# Altium PCB non.PcbDoc
Units mil, origin at the board's own origin, x right, y up, seen from the top; angles counter-clockwise.
Board outline 5000 x 3000 mil, 2 copper layers (Top Layer, Bottom Layer); 35 components, 42 nets, 179 pads, 0 vias.
Unrouted connection lines stored in the file: 110.
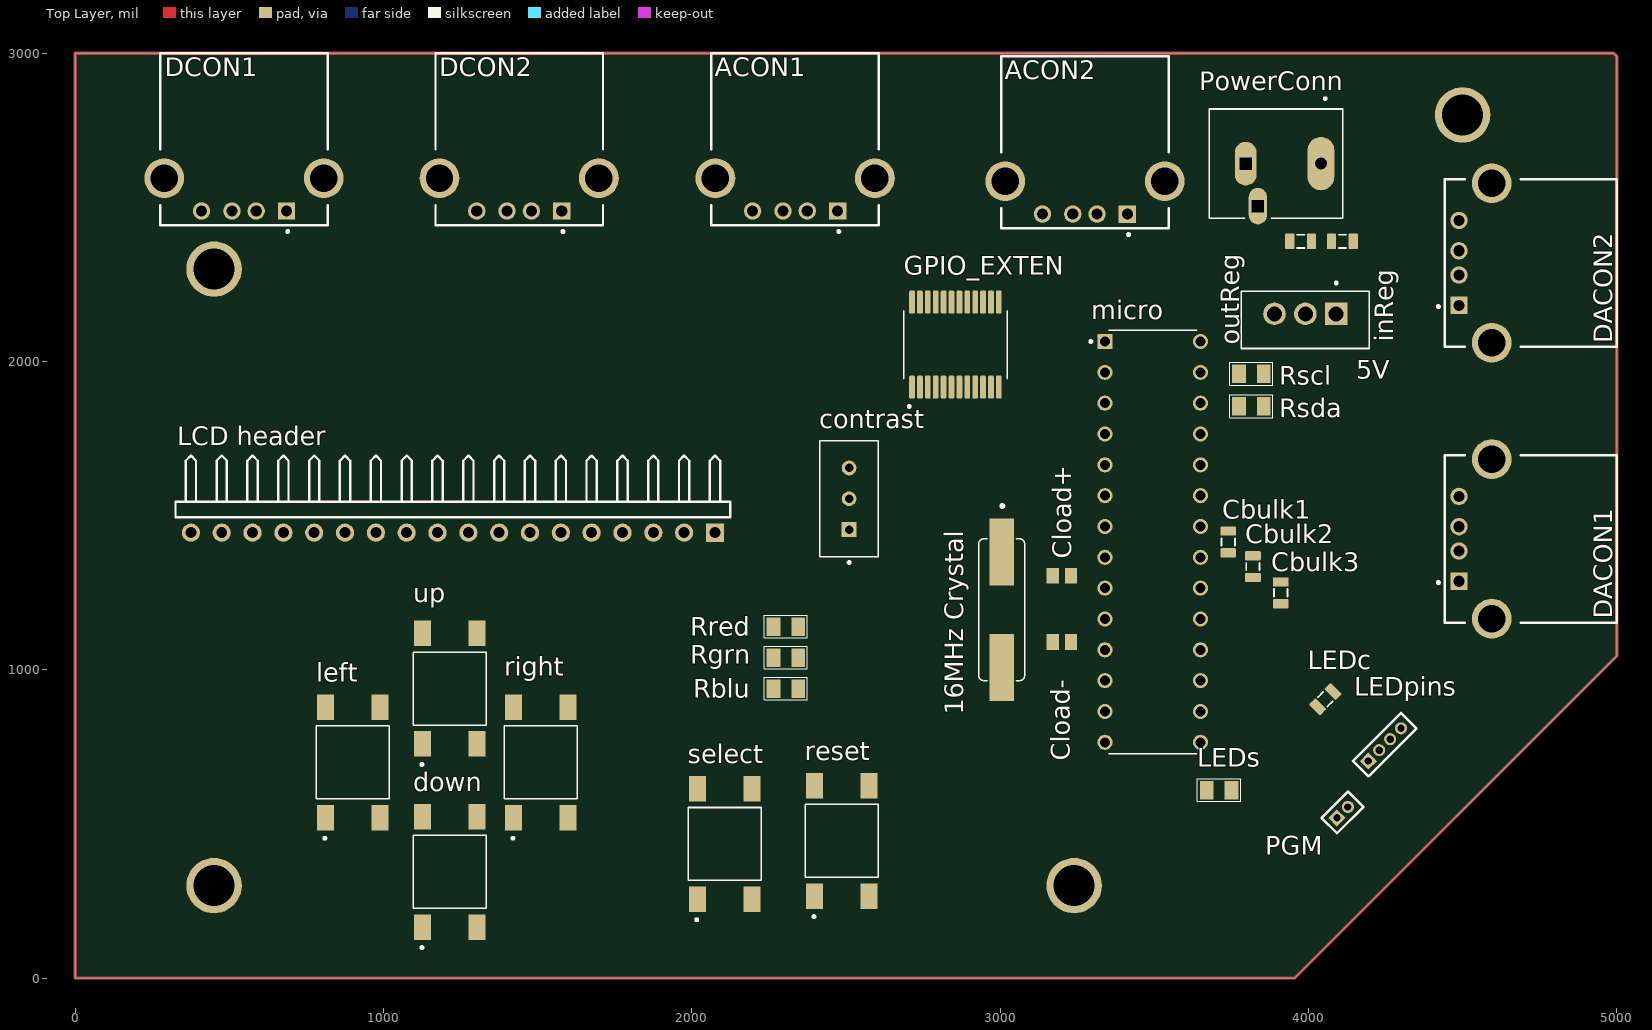
[diagram p0: Top Layer view]
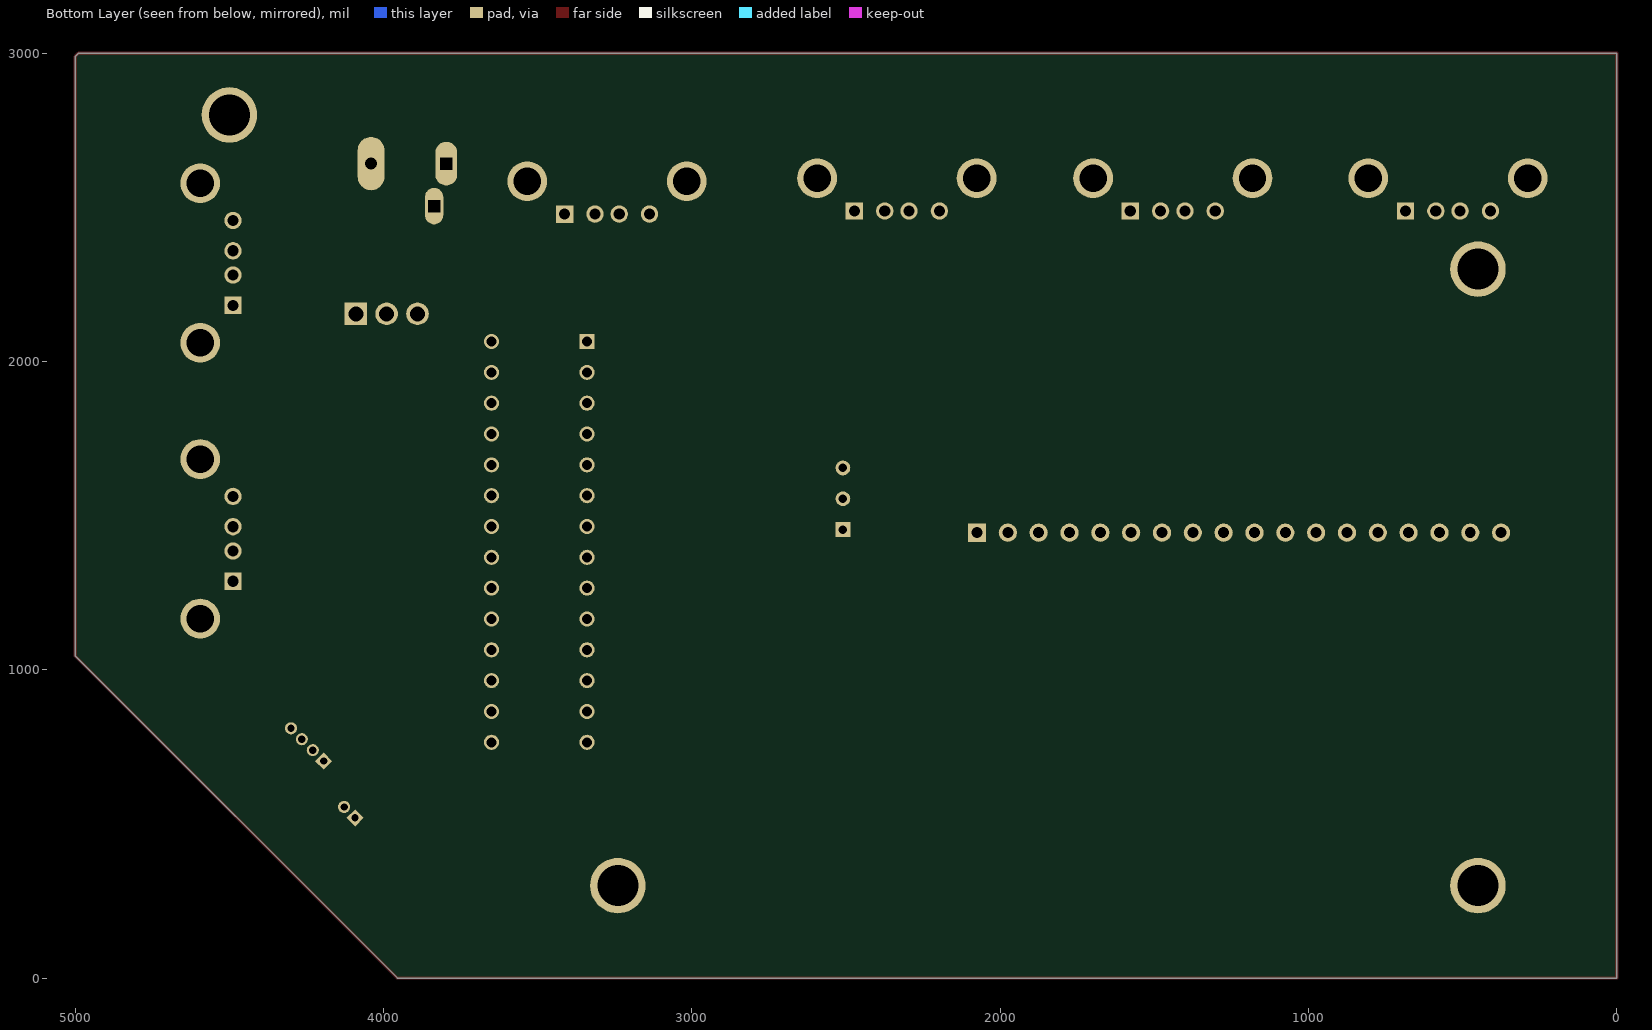
[diagram p1: Bottom Layer view, seen from below]

## Layer stack, top to bottom
Top Solder: solder mask 0.4, Solder Resist, Dk 3.5
Top Layer: signal copper 1.4
Dielectric 1: dielectric 12.6, FR-4, Dk 4.8
Bottom Layer: signal copper 1.4
Bottom Solder: solder mask 0.4, Solder Resist, Dk 3.5

## Board outline
0,0 3955,0 5000,1045 5000,2990 4990,3000 0,3000

## Design rules (kind name [scope] priority, off if disabled: settings)
Clearance [All] p1: gap=10 ignorepadtopadclearanceinfootprint=FALSE except(0: Arc-Hole Track-Hole SMDPad-Hole THPad-Hole Via-Hole Fill-Hole Poly-Hole Region-Hole Text-Hole)
PolygonConnect [All] p1: connectstyle=Relief reliefconductorwidth=10 reliefentries=4 polygonreliefangle="90 Angle" airgapwidth=10
RoutingVias [All] p1: holewidth=28 width=50 viastyle="Through Hole" minholewidth=28 minwidth=50 maxholewidth=28 maxwidth=50
SolderMaskExpansion [All] p1: expansion=4 istentingtop=FALSE
Width [All] p1: maxlimit=10 minlimit=10 preferedwidth=10
30 further rules are at their usual default settings.

## Components (designator, comment, footprint, x,y, rotation, side; value= is the part's Value field where it differs from the comment)
5V "LM78M05CT" TO254P1054X470X1955-3 3990,2155 r180 top
"16MHz Crystal" "FC4SDCBMM16.0-T1" XTAL_FOXSDLF/160-20 3005,1195 r270 top
ACON1 "USB1130-15-A_REVA" GCT_USB1130-15-A_REVA 2335,2595 r180 top
ACON2 "USB1130-15-A_REVA" GCT_USB1130-15-A_REVA 3275,2585 r180 top
Cbulk1 "Capacitor 4.7µF +/-40% 25V 0805" CAPC0805(2012)145_L 3740,1415 r90 top value=100nF
Cbulk2 "Capacitor 4.7µF +/-40% 25V 0805" CAPC0805(2012)145_L 3820,1335 r90 top value=100nF
Cbulk3 "Capacitor 4.7µF +/-40% 25V 0805" CAPC0805(2012)145_L 3910,1250 r90 top value=100nF
Cload+ "Capacitor 1 uF +/- 10% 50 V 0805" CAPC2013X135X45ML10T25 3200,1305 r180 top value=20pF
Cload- "Capacitor 1 uF +/- 10% 50 V 0805" CAPC2013X135X45ML10T25 3200,1090 r0 top value=20pF
contrast "3296W-1-254LF" TRIM_3296W-1-254LF 2510,1555 r90 top
DACON1 "USB1130-15-A_REVA" GCT_USB1130-15-A_REVA 4595,1425 r90 top
DACON2 "USB1130-15-A_REVA" GCT_USB1130-15-A_REVA 4595,2320 r90 top
DCON1 "USB1130-15-A_REVA" GCT_USB1130-15-A_REVA 547.37,2595 r180 top
DCON2 "USB1130-15-A_REVA" GCT_USB1130-15-A_REVA 1440,2595 r180 top
down "4-1437565-2" SW_4-1437565-2 1215,345 r90 top
GPIO_EXTEN "MCP23018-E/SS" SOP65P780X200-24N 2855,2055 r90 top
inReg "Capacitor 4.7µF +/-40% 25V 0805" CAPC0805(2012)145_L 4110.04,2390 r180 top value=330nF
"LCD header" "Header 18H" HDR1X18H 2075,1445 r180 top
LEDc "Capacitor 4.7µF +/-40% 25V 0805" CAPC0805(2012)145_L 4055,905 r45 top value=100nF
LEDpins "MHDR1X4" MHDR1X4 4194.29,704.29 r45 top
LEDs "R_0805_4.7K_1%" 0805_Resistor 3710,610 r0 top value=220
left "4-1437565-2" SW_4-1437565-2 900,700 r90 top
micro "ATMEGA328-PU" DIP787W46P254L3467H508Q28 3495,1415 r0 top
outReg "Capacitor 4.7µF +/-40% 25V 0805" CAPC0805(2012)145_L 3975,2390 r0 top value=100nF
PGM "MHDR1X2" MHDR1X2 4092.64,520 r45 top
PowerConn "PJ-044BH" CUI_PJ-044BH 3895,2642.14 r270 top
Rblu "R_0805_200_1%" 0805_Resistor 2305,939.44 r0 top value=200
reset "4-1437565-2" SW_4-1437565-2 2486.42,445.47 r90 top
Rgrn "R_0805_200_1%" 0805_Resistor 2305,1040 r0 top value=200
right "4-1437565-2" SW_4-1437565-2 1510,700 r90 top
Rred "R_0805_200_1%" 0805_Resistor 2305,1140.56 r0 top value=200
Rscl "R_0805_4.7K_1%" 0805_Resistor 3815,1960 r0 top value=4.7K
Rsda "R_0805_4.7K_1%" 0805_Resistor 3815,1855 r0 top value=4.7K
select "4-1437565-2" SW_4-1437565-2 2106.42,435.47 r90 top
up "4-1437565-2" SW_4-1437565-2 1215,939.13 r90 top

## Footprints (in the part's own frame and the unit in brackets; to place one, negate y for a bottom-side part, rotate by r counter-clockwise, add the part's x,y. Pads: shape width x height; smd on the part's side, far side on the other; paste and mask are expansions set on the pad)
0805_Resistor [mil] "0805 Resistor"
  rect 45x60 smd: 1(-40,0) 2(40,0)
  silkscreen extent -70,-37 70,37, body extent -39,-25 39,25, height 31
CAPC0805(2012)145_L [mm] "Chip Capacitor, Body 2.0x1.2mm, Height 1.45mm, IPC High Density"
  rrect25% 0.76x1.3 smd: 1(-0.9,0) 2(0.89,0)
  silkscreen extent -0.3,-0.55 0.3,0.55, body extent -1,-0.6 1,0.6, height 1.45
CAPC2013X135X45ML10T25 [mm] "Chip Capacitor, 2-Leads, Body 2.10x1.35mm, IPC Low Density"
  rect 1x1.3 smd: 1(-0.75,0) 2(0.75,0)
  body extent -1.05,-0.67 1.05,0.67, height 1.35
CUI_PJ-044BH [mm]
  oval 4.4x2.2 hole 1: 1(0,3.7)
  oval 3.6x1.8 hole 1 square: 2(0,-2.5)
  oval 3.016x1.508 hole 1 square: 3(3.5,-1.5)
  silkscreen extent -5.45,-5.5 4.5,5.5
DIP787W46P254L3467H508Q28 [mm]
  rect 1.25x1.25 hole 0.83: 1(-3.937,16.51)
  round 1.25 hole 0.83: 2(-3.937,13.97) 3(-3.937,11.43) 4(-3.937,8.89) 5(-3.937,6.35) 6(-3.937,3.81) 7(-3.937,1.27) 8(-3.937,-1.27) 9(-3.937,-3.81) 10(-3.937,-6.35) 11(-3.937,-8.89) 12(-3.937,-11.43) 13(-3.937,-13.97) 14(-3.937,-16.51) 15(3.937,-16.51) 16(3.937,-13.97) 17(3.937,-11.43) 18(3.937,-8.89) 19(3.937,-6.35) 20(3.937,-3.81) 21(3.937,-1.27) 22(3.937,1.27) 23(3.937,3.81) 24(3.937,6.35) 25(3.937,8.89) 26(3.937,11.43) 27(3.937,13.97) 28(3.937,16.51)
  silkscreen extent -5.2,-17.45 3.62,17.45, body extent -3.95,-17.34 3.95,17.34, height 4.57
GCT_USB1130-15-A_REVA [mm]
  rect 1.428x1.428 hole 0.92: 1(-3.5,2.71)
  round 1.428 hole 0.92: 2(-1,2.71) 3(1,2.71) 4(3.5,2.71)
  round 3.276 hole 2.26: S1(-6.57,0) S2(6.57,0)
  silkscreen extent -6.9,-10.28 6.9,4.5, body extent -7.8,-10.28 7.8,3.88, height 6.99
HDR1X18H [mm] "Connector; Header; 18 Position; Right Angle"
  rect 1.5x1.5 hole 0.9: 1(0,0)
  round 1.5 hole 0.9: 2(2.54,0) 3(5.08,0) 4(7.62,0) 5(10.16,0) 6(12.7,0) 7(15.24,0) 8(17.78,0) 9(20.32,0) 10(22.86,0) 11(25.4,0) 12(27.94,0) 13(30.48,0) 14(33.02,0) 15(35.56,0) 16(38.1,0) 17(40.64,0) 18(43.18,0)
  silkscreen extent -1.27,-6.35 44.45,-1.27
MHDR1X2 [mm] "Connector; Header; 2 Position"
  rect 1x1 hole 0.6: 1(0,0)
  round 1 hole 0.6: 2(1.27,0)
  silkscreen extent -0.9,-0.9 2.17,0.9
MHDR1X4 [mm] "Connector; Header; 4 Position"
  rect 1x1 hole 0.6: 1(0,0)
  round 1 hole 0.6: 2(1.27,0) 3(2.54,0) 4(3.81,0)
  silkscreen extent -0.9,-0.9 4.71,0.9
SOP65P780X200-24N [mm]
  rrect50% 1.9x0.48 smd: 1(-3.505,3.575) 2(-3.505,2.925) 3(-3.505,2.275) 4(-3.505,1.625) 5(-3.505,0.975) 6(-3.505,0.325) 7(-3.505,-0.325) 8(-3.505,-0.975) 9(-3.505,-1.625) 10(-3.505,-2.275) 11(-3.505,-2.925) 12(-3.505,-3.575) 13(3.505,-3.575) 14(3.505,-2.925) 15(3.505,-2.275) 16(3.505,-1.625) 17(3.505,-0.975) 18(3.505,-0.325) 19(3.505,0.325) 20(3.505,0.975) 21(3.505,1.625) 22(3.505,2.275) 23(3.505,2.925) 24(3.505,3.575)
  silkscreen extent -5.2,-4.25 2.8,4.25
SW_4-1437565-2 [mm]
  rect 2.1x1.4 smd: 1(-4.55,2.25) 2(4.55,2.25) 3(-4.55,-2.25) 4(4.55,-2.25)
  silkscreen extent -6.35,-3 3,3
TO254P1054X470X1955-3 [mm]
  rect 1.86x1.86 hole 1.24: 1(-2.54,0)
  round 1.86 hole 1.24: 2(0,0) 3(2.54,0)
  silkscreen extent -5.27,-2.64 5.27,2.86, body extent -4.98,-4.45 4.98,0, height 15.75
TRIM_3296W-1-254LF [mm]
  rect 1.218x1.218 hole 0.71: 1(-2.54,0)
  round 1.218 hole 0.71: 2(0,0) 3(2.54,0)
  silkscreen extent -5.35,-2.41 4.76,2.42, body extent -4.76,-2.41 4.76,2.42, height 11.55
XTAL_FOXSDLF/160-20 [mm]
  rect 5.5x2 smd: 1(-4.75,0) 2(4.75,0)
  silkscreen extent -8.6,-1.9 5.85,1.9

## Part data
5V: "Linear Voltage Regulator IC 1 Output 500mA TO-220-3", Package="TO-220 ON Semiconductor", Availability=Warning, Check_prices=https://www.snapeda.com/parts/LM78M05CT/ON%20Semiconductor/view-part/2776523/?ref=eda, MF="ON Semiconductor", MP=LM78M05CT, Price=None, Purchase-URL=https://pricing.snapeda.com/search/part/LM78M05CT/?ref=eda, SnapEDA_Link=https://www.snapeda.com/parts/LM78M05CT/ON%20Semiconductor/view-part/2776523/?ref=snap
"16MHz Crystal": "16 MHz Â±30ppm Crystal 20pF 40 Ohms HC-49/US", Package="HC-49/US Fox Electronics", Availability="In Stock", Check_prices=https://www.snapeda.com/parts/FC4SDCBMM16.0-T1/Fox+Electronics/view-part/?ref=eda, MF="Fox Electronics", MP=FC4SDCBMM16.0-T1, Price=None, Purchase-URL=https://pricing.snapeda.com/search/part/FC4SDCBMM16.0-T1/?ref=eda, SnapEDA_Link=https://www.snapeda.com/parts/FC4SDCBMM16.0-T1/Fox+Electronics/view-part/?ref=snap
ACON1 ACON2 DACON1 DACON2 DCON1 DCON2 down left reset right select up: Package=None, Availability=Unavailable, Price=None
  ACON1 ACON2 DACON1 DACON2 DCON1 DCON2: MF="{'manufacturer': u'Global Connector Technology'}", MP=USB1130-15-A_REVA
  down left reset right select up: MF="{'manufacturer': u'TE Connectivity'}", MP=4-1437565-2
Cbulk1 Cbulk2 Cbulk3 inReg LEDc outReg: library part CMP-001-00080-5, "Chip Capacitor, 4.7µF +/-40%, 25V, 0805, Thickness 1.45 mm", Capacitor Type=Ceramic, Case/Package=0805, Max Operating Temperature=85°C, Min Operating Temperature=-55°C, Tolerance=20%, Voltage Rating=25V, Mounting Technology=SMT, Pins=2
Cload+ Cload-: library part CMP-001-00007-7, "Chip Capacitor, 1 uF, +/- 10%, 50 V, 0805 (2012 Metric)", Capacitor Type=Ceramic, Case/Package=0805, Max Operating Temperature=125°C, Min Operating Temperature=-55°C, Tolerance=10%, Voltage Rating=50V, Mounting Technology=SMT, Pins=2
contrast: "Res Cermet Trimmer 500K Ohm 10% 0.5W 25(Elec)Turn 2.19mm (9.53 X 4.83 X 11.55mm) Pin Thru-Hole Tube", Package=None, Availability=Unavailable, MF="{'manufacturer': u'Bourns'}", MP=3296W-1-254LF, Price=None
GPIO_EXTEN: "IC: expander; 16bit I/O port; I2C; SSOP24; 1.8Ã·5.5VDC", Package=None, Availability=Unavailable, MF="{'manufacturer': u'Microchip'}", MP=MCP23018-E/SS, Price=None
"LCD header": "Header, 18-Pin, Right Angle", LatestRevisionDate=17-Jul-2002, LatestRevisionNote="Re-released for DXP Platform.", Publisher="Altium Limited"
LEDpins: "Header, 4-Pin", LatestRevisionDate=17-Jul-2002, LatestRevisionNote="Re-released for DXP Platform.", Publisher="Altium Limited"
LEDs Rscl Rsda: library part CMP-058-000045-1, "RES 4.7K OHM 1/8W 1% 0805 SMD", Manufacturer=Yageo, Manufacturer Part Number=AC0805FR-074K7L, Package=0805_Resistor, Power Rating=0.125W, ComponentLink1Description=DigiKey, ComponentLink1URL=https://www.digikey.com/products/en?keywords=YAG3738TR-ND, Design Item ID=R_0805_4.7K_1%, DigiKey PN=YAG3738TR-ND, Source=resistor.SchLib, SVP Creator="Andrew Wu"
micro: "AVR AVRÂ® ATmega Microcontroller IC 8-Bit 20MHz 32KB (16K x 16) FLASH 28-PDIP", Package=None, Availability=Unavailable, MF="{'manufacturer': u'Microchip Technology'}", MP=ATMEGA328-PU, Price=None
PGM: "Header, 2-Pin", LatestRevisionDate=17-Jul-2002, LatestRevisionNote="Re-released for DXP Platform.", Publisher="Altium Limited"
PowerConn: "2.5 mm Center Pin, 5.0 A, Vertical, Through Hole, Dc Power Jack Connector", Package=None, Availability=Unavailable, MF="{'manufacturer': u'CUI Devices'}", MP=PJ-044BH, Price=None
Rblu Rgrn Rred: library part CMP-058-000027-1, "RES 200 OHM 1/8W 1% 0805 SMD", Manufacturer=Yageo, Manufacturer Part Number=RC0805FR-07200RL, Package=0805_Resistor, Power Rating=0.125W, ComponentLink1Description=DigiKey, ComponentLink1URL=https://www.digikey.com/products/en?keywords=311-200CRCT-ND, Design Item ID=R_0805_200_1%, DigiKey PN=311-200CRCT-ND, Source=resistor.SchLib, SVP Creator="Spencer Berglund"

## Free pads (board coordinates)
  round 180 hole 133 unplated: 2(450,300) 2(450,2300) 2(3240,300) 2(4500,2800)

## Nets (pads, with @x,y where several pads share a name; then routed paths per layer and width w, separated by ;. In a path a pad name is that pad's centre, name@x,y a point inside that pad or via, vN(x,y) a via of type N, cw(c..) or ccw(c..) an arc to the next point about the centre after c; other vN are vias at no path point)
+5: 5V.3 "LCD header.2" "LCD header.15" ACON1.1 ACON2.1 Cbulk1.2 Cbulk2.2 Cbulk3.2 contrast.1 DACON1.1 DACON2.1 DCON1.1 DCON2.1 GPIO_EXTEN.10 GPIO_EXTEN.14 LEDc.1 LEDpins.1 micro.7 micro.20 micro.21 outReg.1 Rscl.1 Rsda.1
+12: 5V.1 inReg.1 PowerConn.1
ACON1-A1: ACON1.2 DACON1.3 micro.23
ACON1-A2: ACON1.3 micro.24
ACON2-A1: ACON2.2 micro.25
ACON2-A2: ACON2.3 DACON2.3 micro.26
contWipe: "LCD header.3" contrast.2
DACON1-D1: DACON1.2 micro.6
DACON2-D1: DACON2.2 micro.17
DCON1-D1: DCON1.2 micro.5
DCON1-D2: DCON1.3 micro.11
DCON2-D1: DCON2.2 micro.15
DCON2-D2: DCON2.3 micro.16
GND: 5V.2 "LCD header.1" ACON1.4 ACON2.4 Cbulk1.1 Cbulk2.1 Cbulk3.1 Cload+.1 Cload-.1 contrast.3 DACON1.4 DACON2.4 DCON1.4 DCON2.4 down.1 down.2 GPIO_EXTEN.1 GPIO_EXTEN.13 inReg.2 LEDc.2 LEDpins.2 LEDpins.3 left.1 left.2 micro.8 micro.22 outReg.2 PowerConn.2 PowerConn.3 reset.1 reset.2 right.1 right.2 select.1 select.2 up.1 up.2
GPA0: GPIO_EXTEN.17 select.3 select.4
GPA1: GPIO_EXTEN.18 right.3 right.4
GPA2: down.3 down.4 GPIO_EXTEN.19
GPA3: GPIO_EXTEN.20 up.3 up.4
GPA4: GPIO_EXTEN.21 left.3 left.4
GPA5: GPIO_EXTEN.22
GPA6: GPIO_EXTEN.23 Rred.2
GPA7: GPIO_EXTEN.24 Rgrn.2
GPB0: GPIO_EXTEN.2 Rblu.2
GPB1: "LCD header.14" GPIO_EXTEN.3
GPB2: "LCD header.13" GPIO_EXTEN.4
GPB3: "LCD header.12" GPIO_EXTEN.5
GPB4: "LCD header.11" GPIO_EXTEN.6
GPB5: "LCD header.6" GPIO_EXTEN.7
GPB6: "LCD header.5" GPIO_EXTEN.8
GPB7: "LCD header.4" GPIO_EXTEN.9
LEDSIG: LEDs.1 micro.12
"NetLCD header_16": "LCD header.16" Rred.1
"NetLCD header_17": "LCD header.17" Rgrn.1
"NetLCD header_18": "LCD header.18" Rblu.1
NetLEDpins_4: LEDpins.4 LEDs.2
OSC+: "16MHz Crystal.1" Cload+.2 micro.9
OSC-: "16MHz Crystal.2" Cload-.2 micro.10
RESET: micro.1 reset.3 reset.4
RX: micro.2 PGM.1
SCL: GPIO_EXTEN.11 micro.28 Rscl.2
SDA: GPIO_EXTEN.12 micro.27 Rsda.2
TX: micro.3 PGM.2
pads on no net: "LCD header.7" "LCD header.8" "LCD header.9" "LCD header.10" ACON1.S1 ACON1.S2 ACON2.S1 ACON2.S2 DACON1.S1 DACON1.S2 DACON2.S1 DACON2.S2 DCON1.S1 DCON1.S2 DCON2.S1 DCON2.S2 GPIO_EXTEN.15 GPIO_EXTEN.16 micro.4 micro.13 micro.14 micro.18 micro.19
copper on no net: | length 15382
  Top Layer w10: 0,0 3955,0 5000,1045 5000,2990 4990,3000 4180,3000 0,3000 0,0

## Text inside footprints (layer, text, board x,y; h text height)
ACON1: Mechanical 13 "PCB EDGE" at 2041.69,2988.7 h32 r180
ACON2: Mechanical 13 "PCB EDGE" at 2981.69,2978.7 h32 r180
DACON1: Mechanical 13 "PCB EDGE" at 4988.7,1718.31 h32 r90
DACON2: Mechanical 13 "PCB EDGE" at 4988.7,2613.31 h32 r90
DCON1: Mechanical 13 "PCB EDGE" at 254.07,2988.7 h32 r180
DCON2: Mechanical 13 "PCB EDGE" at 1146.69,2988.7 h32 r180